# EAGLE board KnobsController (EAGLE 9.4.2)
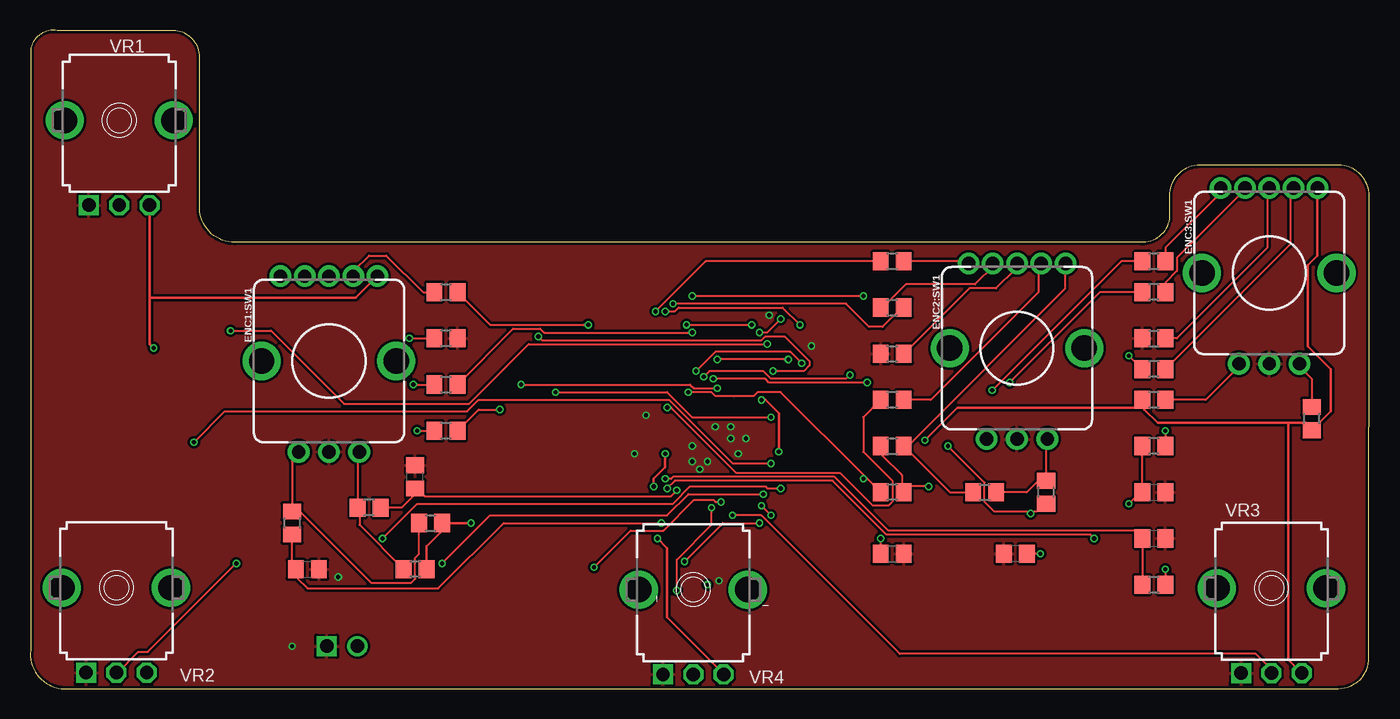
[diagram p0: board, top side]
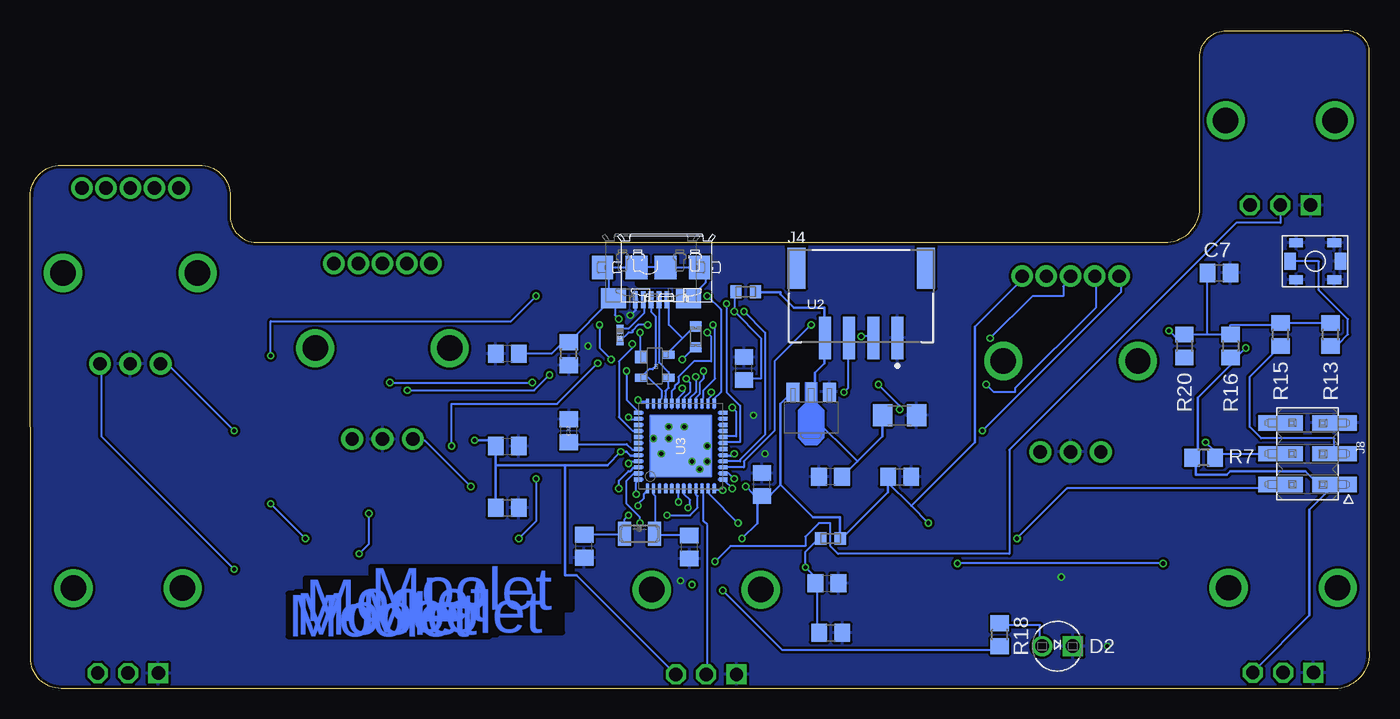
[diagram p1: board, bottom side, seen from below]

Size 110.5 x 54.31 mm. Coordinates in mm from the lower left corner, seen from the top.
Outline: 0.02,52.71 0.02,3.18 arc90 2.56,0 107.97,0 arc90 110.49,2.52 110.51,40.64 arc90 107.97,43.18 96.54,43.18 arc90 94,40.64 94,38.74 arc-90 91.46,36.83 17.16,36.83 arc-90 13.99,39.37 13.99,52.07 arc90 11.78,54.28 2.23,54.28 arc90 0.02,52.71
Copper layers (1*16): Top 0.018mm / dielectric 1.55mm / Bottom 0.018mm
Design rules "eC_2Layer_PClass7_BaseCopperO18": minimum track width 0.125mm, minimum drill 0.35mm, track to track 0.125mm, track to pad 0.125mm, pad to pad 0.125mm, via to via 0.125mm, smd to smd 0mil, copper to edge 0.25mm, drill to drill 0.35mm, minimum pad ring 0.175mm, minimum via ring 0.125mm, stop-mask expansion 0mil, vias tented up to drill 0.45mm, thermal gap 0.2mm
Net classes: 0 default: width 0.152 mm, drill 0.152 mm, clearance 0.152 mm; 1 POWER: width 0.203 mm, drill 0.254 mm, clearance 0.203 mm
bRestrict: 1 lines

## Footprints (pad centres in the part's own frame; a part is rotated, then mirrored left to right if it is on the bottom)
RESISTOR-NICK_C0805 = smd 1.3 x 1.5: 1 -0.95,0; 2 0.95,0
RESISTOR-NICK_C1206 = smd 1.6 x 1.8: 1 -1.4,0; 2 1.4,0
C0805 = smd 1.3 x 1.5: 1 -0.95,0; 2 0.95,0
MK1_ZERO_SOT190P230X110-4N = smd 1 x 1: 1 -1.15,0.75 | smd 1 x 0.6: 2 -1.15,-0.95; 3 1.15,-0.95; 4 1.15,0.95
LED_RADIAL_3MM = drill 1.11 pad 1.67: A 1.27,0 | drill 1.11 pad 1.67 square: C -1.27,0
MK1_ZERO_SODFL1008X40N-882D = smd 0.65 x 0.6: A 0.475,0; C -0.475,0
R0805 = smd 1.3 x 1.5: 1 -0.95,0; 2 0.95,0
ENCODER_LED_3_KIT = drill 1.1 pad 1.778: 1 -4,7; 2 -2,7; 3 0,7; 4 2,7; 5 4,7 | drill 1.1 pad 1.8: A -2.5,-7.5; B 2.5,-7.5; C 0,-7.5 | drill 2.1: M1 -5.55,0; M2 5.55,0
MK1_ZERO_0603-F1608X100N = smd 0.8 x 1: 1 -0.85,0; 2 0.85,0
MK1_ZERO_USBMICRO-ZX62-AB-5PA = smd 0.4 x 1.35: 1 -1.3,3.025; 2 -0.65,3.025; 3 0,3.025; 4 0.65,3.025; 5 1.3,3.025 | smd 2.1 x 1.6: 6 3.1,2.9; 11 -3.1,2.9 | smd 1.8 x 1.9: 7 4,0.35; 10 -4,0.35 | smd 1.9 x 1.9: 8 1.2,0.35; 9 -1.2,0.35
JST---S4B-PH-SM4-TB(LF)(SN)_JST_S4B-PH-SM4-TB_LF_SN_0 = smd 1 x 3.5: 1 3,-3.45; 2 1,-3.45; 3 -1,-3.45; 4 -3,-3.45 | smd 1.5 x 3.4: 5 -5.35,2.3; 6 5.35,2.3
2X3_SMT = smd 1.27 x 3.683: 1 -2.54,-2.223; 2 -2.54,2.223; 3 0,-2.223; 4 0,2.223; 5 2.54,-2.223; 6 2.54,2.223
MK1_ZERO_0603-1608X90N = smd 0.95 x 1: 1 -0.8,0; 2 0.8,0
RESISTOR-NICK_R0805 = smd 1.3 x 1.5: 1 -0.95,0; 2 0.95,0
MK1_ZERO_SOT150P400X160-3N = smd 1.1 x 1.5: 1 -1.5,-1.8; 3 1.5,-1.8 | smd 0.8 x 1.5: 2 0,-1.8
MK1_ZERO_QFN50P700X700X90-49XN-EPSQ515 = smd 0.65 x 0.28: 1 -3.525,2.75; 2 -3.525,2.25; 3 -3.525,1.75; 4 -3.525,1.25; 5 -3.525,0.75; 6 -3.525,0.25; 7 -3.525,-0.25; 8 -3.525,-0.75; 9 -3.525,-1.25; 10 -3.525,-1.75; 11 -3.525,-2.25; 12 -3.525,-2.75; 25 3.525,-2.75; 26 3.525,-2.25; 27 3.525,-1.75; 28 3.525,-1.25; 29 3.525,-0.75; 30 3.525,-0.25; 31 3.525,0.25; 32 3.525,0.75; 33 3.525,1.25; 34 3.525,1.75; 35 3.525,2.25; 36 3.525,2.75 | smd 0.28 x 0.65: 13 -2.75,-3.525; 14 -2.25,-3.525; 15 -1.75,-3.525; 16 -1.25,-3.525; 17 -0.75,-3.525; 18 -0.25,-3.525; 19 0.25,-3.525; 20 0.75,-3.525; 21 1.25,-3.525; 22 1.75,-3.525; 23 2.25,-3.525; 24 2.75,-3.525; 37 2.75,3.525; 38 2.25,3.525; 39 1.75,3.525; 40 1.25,3.525; 41 0.75,3.525; 42 0.25,3.525; 43 -0.25,3.525; 44 -0.75,3.525; 45 -1.25,3.525; 46 -1.75,3.525; 47 -2.25,3.525; 48 -2.75,3.525 | smd 5 x 5: 49 0,0
C&K_PTS820_NOPEGS = smd 1.15 x 0.75: 1 -1.575,1.525; 2 -1.575,-1.525; 3 1.575,1.525; 4 1.575,-1.525 | smd 0.95 x 1.4: 5 -2.075,0; 6 2.075,0
MUSICTHINGMODULAR_9MM_SNAP-IN_POT = drill 1.1 square: 1 -2.5,-7 | drill 1.1 octagon: 2 0,-7; 3 2.5,-7 | drill 2.1 pad 2.794: CHASSIS1 -4.5,0; CHASSIS2 4.5,0
MK1_ZERO_QUARZO-ABS07 = smd 1.1 x 1.9: 1 -1.25,0; 2 1.25,0

## Placement (x,y rotation side)
C4  1nF  [RESISTOR-NICK_C0805]  51.6,26.4 90 bottom
C5  1nF  [RESISTOR-NICK_C1206]  38.75,22.54 0 bottom
C6  4.7nF  [RESISTOR-NICK_C0805]  71.14,27.62 180 bottom
C7  100nF  [C0805]  12.4,34.29 0 bottom
C8  1uF  [RESISTOR-NICK_C0805]  44.47,17.46 180 bottom
C9  20pF  [RESISTOR-NICK_C0805]  56.12,11.68 90 bottom
C10  1uF  [RESISTOR-NICK_C0805]  71.14,20 0 bottom
C11  20pF  [RESISTOR-NICK_C0805]  64.79,11.75 90 bottom
C19  100nF  [RESISTOR-NICK_C0805]  38.75,17.46 0 bottom
C27  4.7uF  [RESISTOR-NICK_C0805]  44.75,8.7 0 bottom
C28  100nF  [RESISTOR-NICK_C0805]  71.14,14.92 0 bottom
C29  100nF  [RESISTOR-NICK_C0805]  50.11,16.83 90 bottom
C30  100nF  [RESISTOR-NICK_C0805]  44.44,4.59 0 bottom
C32  1uF  [RESISTOR-NICK_C0805]  66.06,21.27 90 bottom
D1  MK1_ZERO_PRTR5V0U2X,215  [MK1_ZERO_SOT190P230X110-4N]  58.97,26.61 0 bottom
D2  LED_LTL-1CHG  [LED_RADIAL_3MM]  25.73,3.49 180 bottom
D3  MK1_ZERO_PMEG2005EL  [MK1_ZERO_SODFL1008X40N-882D]  61.83,29.17 270 bottom
ENC1:C1  10nF  [C0805]  31.77,17.46 90 top
ENC1:C3  10nF  [C0805]  22.88,9.84 0 top
ENC1:R1  10k  [R0805]  34.31,28.89 180 top
ENC1:R4  10k  [R0805]  33.04,13.65 0 top
ENC1:R5  10k  [R0805]  21.61,13.65 270 top
ENC1:R7  10k  [R0805]  31.77,9.84 180 top
ENC1:R9  10k  [R0805]  27.96,14.92 180 top
ENC1:R12  10  [R0805]  34.31,21.27 0 top
ENC1:R13  10  [R0805]  34.31,25.08 0 top
ENC1:R14  10  [R0805]  34.31,32.7 0 top
ENC1:SW1  Rotary Encoder  [ENCODER_LED_3_KIT]  24.65,27.02 0 top
ENC2:C1  10nF  [C0805]  81.3,11.11 180 top
ENC2:C3  10nF  [C0805]  71.14,11.11 0 top
ENC2:R1  10k  [R0805]  71.14,27.62 0 top
ENC2:R4  10k  [R0805]  71.14,20 0 top
ENC2:R5  10k  [R0805]  71.14,16.19 180 top
ENC2:R7  10k  [R0805]  78.76,16.19 0 top
ENC2:R9  10k  [R0805]  83.84,16.19 90 top
ENC2:R12  10  [R0805]  71.14,35.24 180 top
ENC2:R13  10  [R0805]  71.14,31.43 0 top
ENC2:R14  10  [R0805]  71.14,23.81 180 top
ENC2:SW1  Rotary Encoder  [ENCODER_LED_3_KIT]  81.44,28.08 0 top
ENC3:C1  10nF  [C0805]  92.73,12.38 0 top
ENC3:C3  10nF  [C0805]  92.73,16.19 0 top
ENC3:R1  10k  [R0805]  92.73,28.89 0 top
ENC3:R4  10k  [R0805]  92.73,23.81 180 top
ENC3:R5  10k  [R0805]  92.73,20 180 top
ENC3:R7  10k  [R0805]  105.76,22.27 90 top
ENC3:R9  10k  [R0805]  92.73,8.57 0 top
ENC3:R12  10  [R0805]  92.73,35.24 180 top
ENC3:R13  10  [R0805]  92.73,32.7 180 top
ENC3:R14  10  [R0805]  92.73,26.35 180 top
ENC3:SW1  Rotary Encoder  [ENCODER_LED_3_KIT]  102.25,34.29 0 top
F2  MK1_ZERO_MF-FSMF050X-2  [MK1_ZERO_0603-F1608X100N]  55.59,29.01 90 bottom
J1  ZX62-AB-5PA(31)  [MK1_ZERO_USBMICRO-ZX62-AB-5PA]  59.27,35.09 180 bottom
J4  JST---S4B-PH-SM4-TB(LF)(SN)_JST_S4B-PH-SM4-TB_LF_SNJST_S4B-PH-SM4-TB_LF_SN_0_0  [JST---S4B-PH-SM4-TB(LF)(SN)_JST_S4B-PH-SM4-TB_LF_SN_0]  41.93,32.38 0 bottom
J8  [2X3_SMT]  5.1,19.37 90 bottom
L2  MK1_ZERO_BLM18PG471SN1D  [MK1_ZERO_0603-1608X90N]  51.45,32.73 0 bottom
L6  MK1_ZERO_BLM18PG471SN1D  [MK1_ZERO_0603-1608X90N]  44.47,12.38 180 bottom
R2  1M  [RESISTOR-NICK_R0805]  66.06,27.62 90 bottom
R7  1K  [R0805]  13.67,19.05 180 bottom
R13  330R  [R0805]  3.19,29.21 90 bottom
R15  39R  [R0805]  7.32,29.21 90 bottom
R16  10K  [R0805]  11.45,28.26 270 bottom
R18  330R  [RESISTOR-NICK_R0805]  30.5,4.45 90 bottom
R20  330R  [R0805]  15.26,28.26 270 bottom
U2  MK1_ZERO_AP7215-33YG-13  [MK1_ZERO_SOT150P400X160-3N]  46.05,22.67 180 bottom
U3  MK1_ZERO_ATSAMD21G18A-48  [MK1_ZERO_QFN50P700X700X90-49XN-EPSQ515]  56.82,20 90 bottom
U$9  PUSHBUTTON2  [C&K_PTS820_NOPEGS]  4.46,35.24 180 bottom
VR1  [MUSICTHINGMODULAR_9MM_SNAP-IN_POT]  7.34,46.88 0 top
VR2  [MUSICTHINGMODULAR_9MM_SNAP-IN_POT]  7.1,8.31 0 top
VR3  [MUSICTHINGMODULAR_9MM_SNAP-IN_POT]  102.44,8.28 0 top
VR4  [MUSICTHINGMODULAR_9MM_SNAP-IN_POT]  54.72,8.16 0 top
Y1  32.768KHz  [MK1_ZERO_QUARZO-ABS07]  60.23,12.76 180 bottom

## Library data of the parts
C4 C5 C9 C11 C19 C27-C30 C32 J1 L2 L6 R2 R18 VR1-VR4 = MKRZero_V5.0
C6 = MKRZero_V5.0; VOLTAGE: 1KV
C7 ENC1:C1 ENC1:C3 ENC1:R1 ENC1:R4 ENC1:R5 ENC1:R7 ENC1:R9 ENC1:R12-ENC1:R14 ENC2:C1 ENC2:C3 ENC2:R1 ENC2:R4 ENC2:R5 ENC2:R7 ENC2:R9 ENC2:R12-ENC2:R14 ENC3:C1 ENC3:C3 ENC3:R1 ENC3:R4 ENC3:R5 ENC3:R7 ENC3:R9 ENC3:R12-ENC3:R14 R7 R13 R15 R16 R20 = resistor-nick
C8 C10 = MKRZero_V5.0; VOLTAGE: 25V
D1 = MKRZero_V5.0; DESCR: TVS DIODE 5.5VWM SOT143B; MF: NXP; MPN: PRTR5V0U2X,215
D2 = MKRZero_V5.0; CREATED_BY: PCBLayout.com; DIGIKEY_PART_NUMBER: 160-1710-ND; MANUFACTURER: Lite-On Inc.; MPN: LTL-1CHG; PACKAGE: RADIAL 3MM
D3 = MKRZero_V5.0; DESCR: DIODE SCHOTTKY 20V 500MA SOD882; MF: NXP; MPN: PMEG2005EL,315
ENC1:SW1 ENC2:SW1 ENC3:SW1 = SparkFun-Switches; PROD_ID: RES-10859; SF_SKU: COM-10982
F2 = MKRZero_V5.0; DESCR: FUSE PTC RESET 500MA SMD 0603; MF: Bourns Inc; MPN: MF-FSMF050X-2
J4 = MKRZero_V5.0; CENTROID_NOT_SPECIFIED: No; DATASHEET: http://www.jst-mfg.com/product/pdf/eng/ePH.pdf; DIGIKEY_DESCRIPTION: CONN HEADER PH SIDE 4POS 2MM SMD; DIGIKEY_PART_NUMBER: 455-1751-1-ND; LEAD_FREE: yes; MF: JST; MPN: S4B-PH-SM4-TB(LF)(SN); PACKAGE: CONN_SMT_HDR4; PREFIX: J; ROHS: yes; TEMPERATURE_RANGE_HIGH: +85°C; TEMPERATURE_RANGE_LOW: -25°C
J8 = MK1_Zero
U2 = MKRZero_V5.0; DESCR: IC REG LDO 3.3V 0.6A SOT89-3; MF: Diodes Inc; MPN: AP7215-33YG-13
U3 = MKRZero_V5.0; DESCR: IC MCU 32BIT 256KB FLASH 48QFN; MF: Atmel; MPN: ATSAMD21E18A-MU
U$9 = Arduino-pushbuttons
Y1 = MKRZero_V5.0; DESCR: CRYSTAL 32.768KHZ 12.5PF SMD 3.2x1.5mm; MF: Abracon; MPN: ABS07-32.768KHZ-T

## Nets
+3V3 [POWER]: C10.1 C19.1 C28.1 C29.1 ENC1:R4.2 ENC1:R7.1 ENC1:SW1.5 ENC3:R4.2 ENC3:R7.1 ENC3:SW1.5 J8.1 L6.1 R7.2 R16.2 U2.3 U3.17 U3.36 U3.44 VR1.3 VR2.3 VR3.3 VR4.3
ENC1:A: ENC1:R4.1 ENC1:R5.1 ENC1:SW1.A
ENC1:B: ENC1:R7.2 ENC1:R9.2 ENC1:SW1.B
ENC1:BLUE_RAW: ENC1:R14.1 ENC1:SW1.4
ENC1:GREEN_RAW: ENC1:R13.1 ENC1:SW1.2
ENC1:RED_RAW: ENC1:R12.1 ENC1:SW1.1
ENC1:SWITCH: ENC1:R1.2 ENC1:SW1.3
ENC2:3.3V: ENC2:R4.2 ENC2:R7.1 ENC2:SW1.5
ENC2:A: ENC2:R4.1 ENC2:R5.1 ENC2:SW1.A
ENC2:B: ENC2:R7.2 ENC2:R9.2 ENC2:SW1.B
ENC2:BLUE_RAW: ENC2:R14.1 ENC2:SW1.4
ENC2:GREEN_RAW: ENC2:R13.1 ENC2:SW1.2
ENC2:RED_RAW: ENC2:R12.1 ENC2:SW1.1
ENC2:SWITCH: ENC2:R1.2 ENC2:SW1.3
ENC3:A: ENC3:R4.1 ENC3:R5.1 ENC3:SW1.A
ENC3:B: ENC3:R7.2 ENC3:R9.2 ENC3:SW1.B
ENC3:BLUE_RAW: ENC3:R14.1 ENC3:SW1.4
ENC3:GREEN_RAW: ENC3:R13.1 ENC3:SW1.2
ENC3:RED_RAW: ENC3:R12.1 ENC3:SW1.1
ENC3:SWITCH: ENC3:R1.2 ENC3:SW1.3
GND [POWER]: C4.2 C5.2 C6.2 C7.2 C8.2 C9.1 C10.2 C11.1 C19.2 C27.2 C28.2 C29.2 C30.2 C32.2 D2.C ENC1:C1.2 ENC1:C3.2 ENC1:R1.1 ENC1:SW1.C ENC2:C1.2 ENC2:C3.2 ENC2:R1.1 ENC2:SW1.C ENC3:C1.2 ENC3:C3.2 ENC3:R1.1 ENC3:SW1.C J1.5 J4.1 J8.5 R2.1 U2.1 U3.5 U3.18 U3.35 U3.42 U3.49 U$9.1 U$9.2 U$9.3 U$9.4 U$9.5 VR1.1 VR2.1 VR3.1 VR4.1
N17650912: D1.4 F2.2 J1.1
N17658775: R13.1 U$9.6
N17852357: C27.1 C30.1 L6.2 U3.6
N17852431: C32.1 U3.43
N$1: C6.1 D1.1 J1.6 J1.7 J1.8 J1.9 J1.10 J1.11 R2.2
N$2: C4.1 F2.1 L2.1
N$4: J8.3 R15.1
N$6: D2.A R18.2
PA00_XIN32: C11.2 U3.1 Y1.2
PA01_XOUT32: C9.2 U3.2 Y1.1
PA02_AIN0: U3.3
PA03_VREFA: U3.4
PA04_AIN4: U3.9 VR3.2
PA05_AIN5: U3.10 VR4.2
PA06_AIN6: ENC1:C3.1 ENC1:R5.2 U3.11
PA07_AIN7: ENC1:C1.1 ENC1:R9.1 U3.12
PA08_S0_I2C_SDA: ENC3:C3.1 ENC3:R5.2 U3.13
PA09_S0_I2C_SCL: ENC3:C1.1 ENC3:R9.1 U3.14
PA10_TCC0-W2: ENC1:R14.2 U3.15
PA11_TCC0-W3: ENC2:R12.2 U3.16
PA12_S2_MOSI: U3.21
PA13_S2_SCK: U3.22
PA14_S2_NSS: U3.23
PA15_S2_MISO: U3.24
PA16_S1_MOSI: ENC3:R14.2 U3.25
PA17_S1_SCK: ENC2:C3.1 ENC2:R5.2 U3.26
PA18_USB_ID: D3.A U3.27
PA19_S1_MISO: ENC2:C1.1 ENC2:R9.1 U3.28
PA20_TCC0-W6: ENC3:R12.2 U3.29
PA21_TCC0-W7: ENC3:R13.2 U3.30
PA22_TC4-W0: ENC1:R12.2 U3.31
PA23_TC4-W1: ENC1:R13.2 U3.32
PA27_CD: U3.39
PA30_SWCLK: J8.4 R7.1 U3.45
PA31_SWDIO: J8.2 U3.46
PB02_AIN10: U3.47 VR1.2
PB03_AIN11: U3.48 VR2.2
PB08_LED: R18.1 U3.7
PB09_ADC: U3.8
PB10_TCC0-W4: ENC2:R13.2 U3.19
PB11_TCC0-W5: ENC2:R14.2 U3.20
PB22_S5_TX: J4.2 U3.37
PB23_S5_RX: J4.3 U3.38
RESET#: R20.2
RESETN: C7.1 R13.2 R15.2 R16.1 R20.1 U3.40
USB_ID: D3.C J1.4
USB_N: D1.3 J1.2 U3.33
USB_P: D1.2 J1.3 U3.34
VUSB [POWER]: C5.1 C8.1 J4.4 L2.2 U2.2

## Tracks (layer width: path | path; a pad name or v marks a point on that pad's centre or on a via)
+3V3  (via drill 0.35)
  Top 0.203: 91.93,23.18 91.93,23.02 93.05,21.91 103.84,21.91 | 91.93,23.18 91.93,23.81 ENC3:R4.2 91.93,23.18 | 103.84,21.91 105.27,21.91 105.75,21.43 ENC3:R7.1 105.9,21.43 107.33,22.86 107.33,26.35 105.43,28.26 105.43,34.92 106.22,35.72 106.22,41.28 ENC3:SW1.5 | 103.84,21.91 103.84,2.38 104.79,1.43 VR3.3 | v60.34,23.81 60.66,23.81 61.77,22.7 v61.77,19.53 | v52.41,19.37 52.41,18.26 51.45,17.3 v51.45,16.67 | ENC1:R7.1 32.72,11.75 33.83,12.86 33.83,13.65 ENC1:R4.2 v36.37,13.65 | 9.86,32.23 9.86,28.42 v10.18,28.1 | 9.86,32.23 9.86,39.85 VR1.3 | 9.86,32.23 26.85,32.23 28.59,33.97 ENC1:SW1.5 | v51.77,12.38 52.56,11.59 52.56,5.87 57.17,1.27 VR4.3 | 91.93,23.18 76.53,23.18 v73.84,20.48
  Bottom 0.203: v60.34,23.81 60.34,23.65 59.55,23.65 U3.36 | U3.44 60.34,19.21 60.98,19.21 61.3,19.53 v61.77,19.53 62.88,18.42 66.38,18.42 | C10.1 72.09,18.42 | 72.09,18.42 C28.1 | 72.09,18.42 66.38,18.42 | 66.38,18.42 66.38,9.37 65.42,9.37 57.33,1.27 VR4.3 | v52.41,19.37 52.56,19.21 53.2,19.21 U3.17 | v51.45,16.67 50.82,16.03 50.5,16.03 | 50.5,16.03 50.18,16.03 C29.1 | 48.6,16.83 48.6,23.49 47.64,24.45 U2.3 | 48.6,16.83 49.39,16.03 50.02,16.03 C29.1 | 39.71,16.99 C19.1 39.71,16.99 | 39.71,16.99 39.71,16.19 43.52,12.38 L6.1 43.67,14.13 45.9,14.13 48.6,16.83 | 39.71,16.99 37.8,15.08 | 37.8,15.08 v36.37,13.65 | J8.1 3.51,16.19 | 3.51,16.19 4.94,14.76 4.94,6.03 9.54,1.43 VR2.3 | 14.3,19.21 14.15,19.37 14.15,23.97 11.45,26.67 11.45,26.83 | 14.3,19.21 14.46,19.05 R7.2 14.3,19.21 | 11.45,26.83 R16.2 | 11.45,26.83 v10.18,28.1 | 3.51,16.19 5.26,17.94 11.45,17.94 11.77,17.62 14.3,17.62 14.3,19.21 | 37.8,15.08 32.56,20.32 32.56,29.85 28.75,33.65 28.75,33.97 ENC1:SW1.5 | v51.77,12.38 50.5,13.65 50.5,16.03 | 50.5,16.03 C29.1 | v73.84,20.48 72.09,20.48 C10.1 | C10.1
ENC1:A
  Top 0.152: 21.61,15.24 21.61,18.73 22.24,19.37 ENC1:SW1.A | 21.61,15.24 28.12,8.73 31.45,8.73 31.77,9.05 31.77,10.8 32.09,11.11 ENC1:R4.1 | 21.61,15.24 ENC1:R5.1
ENC1:B
  Top 0.152: ENC1:SW1.B 27.01,19.37 ENC1:R9.2 27.16,14.92 27.16,13.49 ENC1:R7.2
ENC1:BLUE_RAW
  Top 0.152: ENC1:R14.1 32.4,32.7 29.39,35.72 27.96,35.72 26.69,34.45 26.69,34.13 ENC1:SW1.4
ENC1:GREEN_RAW  (via drill 0.35)
  Top 0.152: v31.61,25.08 ENC1:R13.1
  Bottom 0.152: v31.61,25.08 30.97,24.45 29.23,24.45 29.23,24.76 22.56,31.43 22.56,33.97 ENC1:SW1.2
ENC1:RED_RAW  (via drill 0.35)
  Top 0.152: v31.93,21.27 ENC1:R12.1
  Bottom 0.152: v31.93,21.27 20.5,32.7 20.5,33.97 ENC1:SW1.1
ENC1:SWITCH  (via drill 0.35)
  Top 0.152: v31.29,28.89 ENC1:R1.2
  Bottom 0.152: v31.29,28.89 27.8,32.39 25.26,32.39 25.26,33.18 24.78,33.65 24.78,33.97 ENC1:SW1.3
ENC2:3.3V
  Top 0.152: ENC2:R7.1 75.9,16.19 72.25,19.84 | 72.25,19.84 ENC2:R4.2 72.25,19.84 | 72.25,19.84 85.42,33.02 85.42,34.92 ENC2:SW1.5
ENC2:A  (via drill 0.35)
  Top 0.152: 71.93,16.67 71.93,17.62 70.34,19.21 70.34,20 ENC2:R4.1 | 71.93,16.67 71.93,16.19 ENC2:R5.1 71.93,16.67 | v74.15,16.67 71.93,16.67
  Bottom 0.152: v74.15,16.67 77.96,20.48 78.92,20.48 ENC2:SW1.A
ENC2:B
  Top 0.152: ENC2:R7.2 82.25,16.19 83.04,16.99 83.84,16.99 ENC2:R9.2 83.84,20.48 ENC2:SW1.B
ENC2:BLUE_RAW
  Top 0.152: ENC2:R14.1 74.31,23.81 83.2,32.7 83.2,34.77 83.36,34.92 ENC2:SW1.4
ENC2:GREEN_RAW
  Top 0.152: ENC2:R13.1 70.34,31.43 72.25,33.34 77.96,33.34 79.55,34.92 ENC2:SW1.2
ENC2:RED_RAW
  Top 0.152: ENC2:R12.1 77.17,35.24 77.33,35.08 ENC2:SW1.1
ENC2:SWITCH
  Top 0.152: ENC2:R1.2 77.49,33.02 79.71,33.02 81.3,34.61 81.3,34.92 ENC2:SW1.3
ENC3:A  (via drill 0.35)
  Top 0.152: v93.68,21.27 ENC3:R5.1 | ENC3:R4.1 97.01,23.81 99.87,26.67 ENC3:SW1.A
  Bottom 0.152: v93.68,21.27 99.08,26.67 99.71,26.67 ENC3:SW1.A
ENC3:B  (via drill 0.35)
  Top 0.152: v93.68,9.84 ENC3:R9.2 | ENC3:R7.2 105.75,23.34 105.75,25.56 104.63,26.67 ENC3:SW1.B
  Bottom 0.152: v93.68,9.84 104.63,20.8 104.63,26.67 ENC3:SW1.B
ENC3:BLUE_RAW
  Top 0.152: ENC3:R14.1 104,36.67 104,41.12 104.16,41.28 ENC3:SW1.4
ENC3:GREEN_RAW
  Top 0.152: ENC3:R13.1 93.68,33.5 94.63,34.45 94.63,35.56 100.35,41.28 ENC3:SW1.2
ENC3:RED_RAW
  Top 0.152: ENC3:R12.1 93.68,36.35 98.13,40.8 98.13,41.28 ENC3:SW1.1
ENC3:SWITCH
  Top 0.152: ENC3:R1.2 94.63,28.89 102.09,36.35 102.09,41.12 102.25,41.28 ENC3:SW1.3
GND  (via drill 0.35)
  Bottom 0.203: J1.5 60.57,31.2 v60.98,30.8
  other vias: 55.26,18.1 54.63,18.73 54.63,20 55.9,18.73 56.53,21.59 57.8,21.59 57.8,20.64 59.07,20.64 58.44,19.37 50.82,22.54 49.86,19.37 64.47,28.26 21.61,3.49 25.42,9.21 56.85,8.89
  pour Top: -21.57,-0.45 -6.31,59.51 118.67,59.51 118.67,-0.22
  pour Bottom: 0.02,73.34 123.21,73.34 123.21,6.03 123.21,-23.81 -25.38,-23.81 -25.38,73.34
N17650912
  Bottom 0.152: 56.69,28.89 57.8,27.78 57.8,27.62 D1.4 | 56.69,28.89 55.74,29.85 F2.2 | 56.69,28.89 57.8,30 57.8,31.91 57.96,32.07 J1.1
N17658775
  Bottom 0.152: U$9.6 4.15,35.24 4.15,32.86 1.76,30.48 1.76,29.21 2.56,28.42 3.19,28.42 R13.1
N17852357  (via drill 0.35)
  Top 0.152: v57.01,15.4 56.53,15.4 56.37,15.56 54.79,15.56 52.25,13.02 49.55,13.02 v46.53,10
  Bottom 0.152: v57.01,15.4 57.01,16.35 U3.6 | L6.2 45.42,12.38 46.53,11.27 v46.53,10 45.74,9.21 45.74,8.73 C27.1 45.58,8.57 45.58,4.76 45.42,4.6 C30.1
N17852431
  Bottom 0.152: C32.1 66.06,20.16 61.3,20.16 60.82,19.69 60.34,19.69 U3.43
N$1  (via drill 0.35)
  Top 0.152: v61.93,30.48 60.82,29.37 v60.18,29.37
  Bottom 0.152: J1.11 56.06,32.23 54.79,33.5 54.79,34.13 55.26,34.61 J1.10 55.42,34.77 57.96,34.77 J1.9 58.12,34.77 60.34,34.77 J1.8 60.5,34.77 63.2,34.77 J1.7 63.2,34.61 62.72,34.13 62.72,31.91 | v60.18,29.37 60.18,27.46 D1.1 | v61.93,30.48 62.25,30.8 62.25,32.07 J1.6 | 62.72,31.91 62.41,32.23 J1.6 | 62.72,31.91 R2.2 66.06,28.42 66.69,28.42 67.49,27.62 C6.1 | 62.72,31.91 J1.6
N$2  (via drill 0.35)
  Top 0.152: v62.56,27.15 v56.69,27.15 | v63.52,30 62.09,31.43 53.52,31.43 53.2,31.12 v52.41,31.12
  Bottom 0.152: v56.69,27.15 55.74,28.1 F2.1 | v62.56,27.15 63.52,28.1 v63.52,30 | L2.1 52.41,32.7 v52.41,31.12 50.18,28.89 50.18,25.56 51.45,25.56 C4.1
N$3  (via drill 0.35)
  other vias: 55.9,8.57
N$4
  Bottom 0.152: J8.3 2.87,20.64 8.91,20.64 9.86,21.59 9.86,25.72 R15.1
N$6
  Bottom 0.152: D2.A 27.16,3.65 27.16,5.24 30.5,5.24 R18.2
PA00_XIN32  (via drill 0.35)
  Top 0.152: v61.14,14.29 v60.34,15.08
  Bottom 0.152: v60.34,15.08 60.34,15.24 59.87,15.72 59.87,16.03 59.55,16.35 U3.1 | v61.14,14.29 61.45,13.97 61.45,12.86 Y1.2 61.61,12.7 C11.2
PA01_XOUT32
  Bottom 0.152: U3.2 59.07,16.35 59.07,16.03 58.91,15.87 58.91,12.86 Y1.1 58.91,12.7 56.21,12.7 C9.2
PA04_AIN4  (via drill 0.35)
  Top 0.152: v57.96,14.29 60.34,14.29 71.77,2.86 101.14,2.86 102.57,1.43 VR3.2
  Bottom 0.152: v57.96,14.29 56.06,14.29 55.42,14.92 55.42,15.87 55.58,16.03 55.58,16.35 U3.9
PA05_AIN5
  Bottom 0.152: U3.10 54.95,16.35 54.95,13.81 54.63,13.49 54.63,1.27 VR4.2
PA06_AIN6  (via drill 0.35)
  Top 0.152: v52.09,13.65 39.07,13.65 33.67,8.25 22.88,8.25 22.08,9.05 22.08,9.84 ENC1:C3.1 21.61,10.16 ENC1:R5.2
  Bottom 0.152: v52.09,13.65 54.47,16.03 54.47,16.35 U3.11
PA07_AIN7  (via drill 0.35)
  Top 0.152: v53.36,16.35 52.88,15.87 32.56,15.87 32.09,16.35 | 32.09,16.35 31.77,16.67 ENC1:C1.1 32.09,16.35 | ENC1:R9.1 30.66,14.92 32.09,16.35
  Bottom 0.152: v53.36,16.35 53.99,16.35 U3.12
PA08_S0_I2C_SDA  (via drill 0.35)
  Top 0.152: v52.56,16.51 53.2,17.14 66.22,17.14 70.66,12.7 87.49,12.7 v87.81,12.38 | v90.66,15.24 91.62,16.19 ENC3:C3.1 | ENC3:C3.1 ENC3:R5.2 | ENC3:C3.1
  Bottom 0.152: v52.56,16.51 53.2,17.14 U3.13 | v90.66,15.24 v87.81,12.38
PA09_S0_I2C_SCL  (via drill 0.35)
  Top 0.152: v52.41,17.3 52.88,17.3 53.04,17.46 66.38,17.46 70.82,13.02 91.14,13.02 ENC3:C1.1 | ENC3:C1.1 ENC3:R9.1 | ENC3:C1.1
  Bottom 0.152: v52.41,17.3 52.88,17.78 53.2,17.78 U3.14
PA10_TCC0-W2  (via drill 0.35)
  Top 0.152: v46.06,30 37.96,30 ENC1:R14.2
  Bottom 0.152: v46.06,30 49.07,26.99 49.07,21.27 51.61,18.73 51.61,18.26 53.2,18.26 U3.15
PA11_TCC0-W3  (via drill 0.35)
  Top 0.152: v51.61,31.12 55.74,35.24 ENC2:R12.2
  Bottom 0.152: v51.61,31.12 49.86,29.37 49.86,20.96 51.93,18.89 51.93,18.73 53.2,18.73 U3.16
PA16_S1_MOSI  (via drill 0.35)
  Top 0.152: v68.76,32.39 v54.63,32.39 | v90.66,27.46 ENC3:R14.2
  Bottom 0.152: v54.63,32.39 53.52,31.27 53.52,24.45 54.07,23.9 U3.25 | v68.76,32.39 70.82,30.32 90.66,30.32 v90.66,27.46
PA17_S1_SCK  (via drill 0.35)
  Top 0.152: v54.31,24.45 56.21,24.45 56.53,24.13 59.71,24.13 60.03,24.45 61.93,24.45 68.91,17.46 | 68.91,17.46 ENC2:R5.2 | v70.19,12.38 ENC2:C3.1 | 68.91,17.46 v68.76,17.3
  Bottom 0.152: v54.31,24.45 54.31,24.13 54.55,23.89 54.55,23.55 U3.26 | v70.19,12.38 68.76,13.81 v68.76,17.3
PA18_USB_ID  (via drill 0.35)
  Top 0.152: v54.15,30 v59.55,30
  Bottom 0.152: v59.55,30 60.34,30 60.82,29.53 60.82,29.37 61.14,29.37 61.77,28.73 D3.A | v54.15,30 53.99,29.85 53.99,25.56 54.95,24.61 54.95,23.97 55.1,23.81 55.1,23.65 U3.27
PA19_S1_MISO  (via drill 0.35)
  Top 0.152: v54.95,26.19 56.53,27.78 62.72,27.78 v63.68,26.83 | v75.74,20 78.76,16.99 78.76,15.4 79.55,14.6 82.57,14.6 | 82.57,14.6 83.04,14.6 83.84,15.4 ENC2:R9.1 | v83.36,11.11 ENC2:C1.1 | 82.57,14.6 v82.57,14.45
  Bottom 0.152: v54.95,26.19 54.95,25.56 55.26,25.24 55.26,24.29 55.58,23.97 55.58,23.65 U3.28 | v63.68,26.83 67.01,23.49 75.74,23.49 v75.74,20 | v83.36,11.11 82.57,11.91 v82.57,14.45
PA20_TCC0-W6  (via drill 0.35)
  Top 0.152: v55.58,25.72 56.06,26.19 60.5,26.19 61.14,25.56 67.33,25.56 v67.64,25.88 | v79.39,24.61 90.03,35.24 ENC3:R12.2
  Bottom 0.152: v55.58,25.72 55.58,24.45 56.06,23.97 56.06,23.65 U3.29 | v67.64,25.88 68.91,24.61 v79.39,24.61
PA21_TCC0-W7  (via drill 0.35)
  Top 0.152: v56.37,25.56 60.66,25.56 60.98,25.24 v69.07,25.24 | v80.82,25.24 88.28,32.7 ENC3:R13.2
  Bottom 0.152: v56.37,25.56 56.06,25.24 56.06,24.45 56.53,23.97 56.53,23.65 U3.30 | v80.82,25.24 v69.07,25.24
PA22_TC4-W0  (via drill 0.35)
  Top 0.152: v56.69,24.76 54.79,24.76 54.47,25.08 v40.5,25.08 | v38.75,23.02 37.01,23.02 ENC1:R12.2
  Bottom 0.152: v56.69,24.76 56.53,24.61 56.53,24.45 57.01,23.97 57.01,23.65 U3.31 | v40.5,25.08 38.75,23.34 v38.75,23.02
PA23_TC4-W1  (via drill 0.35)
  Top 0.152: v54.63,29.37 42.4,29.37 42.09,29.69 39.86,29.69 ENC1:R13.2
  Bottom 0.152: U3.32 57.56,24.53 57.33,24.76 57.33,24.92 57.01,25.24 57.01,25.72 55.74,26.99 54.31,26.99 54.31,29.05 v54.63,29.37
PA30_SWCLK  (via drill 0.35)
  Top 0.152: v61.14,18.57 57.96,18.57 52.72,23.81 37.01,23.81 36.05,22.86 16.05,22.86 v13.51,20.32
  Bottom 0.152: v61.14,18.57 60.98,18.73 60.34,18.73 U3.45 | v13.51,20.32 12.88,19.69 12.88,19.37 | 12.88,19.37 12.88,19.05 R7.1 12.88,19.37 | 12.88,19.37 J8.4
PA31_SWDIO  (via drill 0.35)
  Top 0.152: v61.93,16.51 60.82,16.51 60.66,16.67 54.47,16.67 53.04,15.24 31.93,15.24 v29.07,12.38
  Bottom 0.152: v61.93,16.51 61.93,17.14 61.14,17.94 60.98,17.94 60.66,18.26 U3.46 | v29.07,12.38 24.94,16.51 7.32,16.51 J8.2
PB02_AIN10  (via drill 0.35)
  Top 0.152: v60.18,13.65 57.17,13.65 v53.99,10.48
  Bottom 0.152: v60.18,13.65 60.18,14.13 61.3,15.24 61.3,17.14 60.66,17.78 60.34,17.78 U3.47 | v53.99,10.48 52.72,11.75 46.53,11.75 46.53,12.54 45.42,13.65 44.47,13.65 44.47,11.75 43.83,11.11 29.7,11.11 29.7,19.69 10.97,38.42 7.32,38.42 7.32,39.85 VR1.2
PB03_AIN11  (via drill 0.35)
  Top 0.152: v60.5,16.03 54.31,16.03 52.56,14.29 37.96,14.29 v33.99,10.32 | v17,10.32 9.7,3.02 8.91,3.02 7.16,1.27 VR2.2
  Bottom 0.152: v60.5,16.03 60.5,16.99 60.34,17.14 U3.48 | v17,10.32 v33.99,10.32
PB08_LED  (via drill 0.35)
  Top 0.152: v56.21,14.92 56.21,13.49 53.36,10.64 v53.36,8.1
  Bottom 0.152: v56.21,14.92 56.06,15.08 56.06,15.56 56.53,16.03 56.53,16.35 U3.7 | v53.36,8.1 48.44,3.18 30.5,3.18 R18.1
PB10_TCC0-W4  (via drill 0.35)
  Top 0.152: v53.04,31.75 67.33,31.75 69.23,29.85 70.34,29.85 71.93,31.43 ENC2:R13.2
  Bottom 0.152: v53.04,31.75 53.04,24.45 51.93,23.34 51.93,20.32 53.2,20.32 U3.19
PB11_TCC0-W5  (via drill 0.35)
  Top 0.152: v52.56,23.18 52.88,23.18 58.28,17.78 66.85,17.78 69.55,15.08 70.82,15.08 71.14,15.4 71.14,17.14 68.76,19.53 68.76,22.38 ENC2:R14.2
  Bottom 0.152: v52.56,23.18 52.25,22.86 52.25,20.8 53.2,20.8 U3.20
PB22_S5_TX  (via drill 0.35)
  Top 0.152: v61.3,26.19 63.84,26.19 64.31,26.67 64.31,26.99 62.25,29.05 60.66,29.05 60.34,28.73 42.24,28.73 v41.93,29.05
  Bottom 0.152: v61.3,26.19 61.3,23.81 60.34,22.86 U3.37 | v41.93,29.05 40.98,29.05 J4.2
PB23_S5_RX  (via drill 0.35)
  Top 0.152: v61.14,22.38 54.63,22.38 52.56,24.45 v43.36,24.45
  Bottom 0.152: v61.14,22.38 60.98,22.23 60.34,22.23 U3.38 | v43.36,24.45 43.04,24.76 43.04,28.89 J4.3
RESETN  (via drill 0.35)
  Top 0.152: v60.82,28.42 41.13,28.42 36.21,23.49 25.89,23.49 19.86,29.53 v16.53,29.53
  Bottom 0.152: R13.2 R15.2 7.32,30 11.45,30 R16.1 | v60.82,28.42 60.82,28.1 61.93,26.99 61.93,22.38 60.82,21.27 60.34,21.27 U3.40 | v16.53,29.53 16.05,29.05 15.26,29.05 R20.1 13.35,29.21 | 13.35,29.21 R16.1 | 13.35,29.21 C7.1 | R16.1
USB_ID
  Bottom 0.152: D3.C 61.77,29.69 61.14,29.69 59.87,30.96 59.87,32.07 J1.4
USB_N  (1 unrouted)
  Bottom 0.152: 58.08,24 58.08,24.13 58.08,24.55 57.99,24.64 57.82,24.81 D1.3 57.82,26.11 58.62,26.9 58.62,32.06 58.6,32.07 J1.2 | 58.07,23.99 U3.33 58.12,23.81
USB_P
  Bottom 0.152: J1.3 59.27,31.07 58.92,30.71 58.92,26.55 59.15,26.32 59.45,26.32 D1.2 59.49,25.66 58.39,24.55 58.39,24 58.57,23.82 58.6,23.81 58.6,23.65 U3.34
VUSB
  Bottom 0.203: 42.24,18.73 40.18,20.8 40.18,22.54 C5.1 | 42.24,18.73 C8.1 | L2.2 50.5,32.7 48.6,32.7 48.6,32.54 47.48,31.43 44.94,31.43 44.94,29.05 J4.4 44.94,28.89 44.94,26.83 45.74,26.03 45.74,24.92 46.06,24.61 U2.2 46.06,22.54 42.24,18.73

## Text on the board
Bottom: Moolet | Moolet | Moolet | Moolet | Moolet
tValues: knob controller | v1.1 | MOOLET | modular | audio
bValues: Moolet | https://github.com/newdigate